# EAGLE board Prairie_Dogs_V1 (EAGLE 9.6.2)

Size 172.72 x 106.41 mm. Coordinates in mm from the lower left corner, seen from the top.
Outline: 168.83,106.41 5.28,106.17 arc90 0,100.89 0,4.33 arc90 4.33,0 166.75,0.24 arc90 172.72,6.22 172.72,102.53 arc90 168.83,106.41
Copper layers (1*16): Top 0.035559375mm / dielectric 1.6mm / Bottom 0.035559375mm
Design rules "oshpark-2layer (1) *": minimum track width 10mil, minimum drill 10mil, track to track 8mil, track to pad 8mil, pad to pad 8mil, via to via 8mil, smd to smd 8mil, copper to edge 15mil, drill to drill 6mil, minimum pad ring 5mil, minimum via ring 5mil, stop-mask expansion 2.5mil, vias tented up to drill 25mil, thermal gap 10mil

## Footprints (pad centres in the part's own frame; a part is rotated, then mirrored left to right if it is on the bottom)
M0805 = smd 1.3 x 1.6: 1 -0.95,0; 2 0.95,0
MSTBA3 = drill 1.397 long: 1 -5.08,5.08; 2 0,5.08; 3 5.08,5.08
MSTBA2 = drill 1.397 long: 1 -2.54,5.08; 2 2.54,5.08
MSTBA5 = drill 1.397 long: 1 -10.16,5.08; 2 -5.08,5.08; 3 0,5.08; 4 5.08,5.08; 5 10.16,5.08
MSTBA4 = drill 1.397 long: 1 -7.62,5.08; 2 -2.54,5.08; 3 2.54,5.08; 4 7.62,5.08
SO-8_POWER_PAK = smd 0.762 x 2.032: D1 -3.423,2.437; D2 -2.153,2.437; D3 -0.883,2.437; D4 0.387,2.437; G 0.387,-3.532 | smd 3.81 x 3.048: D5 -1.518,0.278 | smd 3.302 x 2.032: S -2.153,-3.532
STANDOFF_ELECTRICAL_5_32 = drill 3.969 pad 7.62: P1 0,0
P2-38-17 = drill 1.702 pad 2.121 long: TP-1 -1.905,0; TP-2 1.905,0
ADAFRUIT_LENOARDO = drill 1.016 pad 1.88: 3V -10.16,-21.59; 5V -10.16,8.89; A0 -10.16,1.27; A1 -10.16,-1.27; A2 -10.16,-3.81; A3 -10.16,-6.35; A4 -10.16,-8.89; A5 -10.16,-11.43; AREF -10.16,6.35; D4 2.54,-21.59; D5 5.08,-11.43; D6 0,-21.59; D7 5.08,-8.89; D8 -2.54,-21.59; D9 5.08,-6.35; D10 5.08,-3.81; D11 5.08,-1.27; D12 5.08,1.27; D13 5.08,3.81; EN -7.62,-21.59; GND@0 -10.16,3.81; GND@1 -5.08,-21.59; GND@2 5.08,8.89; MISO -10.16,-19.05; MOSI -10.16,-16.51; RES -10.16,11.43; RX 5.08,-21.59; SCK -10.16,-13.97; SCL 5.08,-13.97; SDA 5.08,-16.51; TX 5.08,-19.05; USB 5.08,6.35; VIN 5.08,11.43

## Placement (x,y rotation side)
10K  [M0805]  44.45,49.52 270 top
10K1  [M0805]  36.83,49.52 270 top
12V_IN  MSTBA3  [MSTBA3]  142.24,6.34 0 top
CALIBRATION_BTN  MSTBA2  [MSTBA2]  138.43,100.32 180 top
FAN_CONTROL  MSTBA2  [MSTBA2]  69.85,100.32 180 top
HAPP_STARTBUTTON  MSTBA5  [MSTBA5]  107.44,100.32 180 top
OXY_SENSOR_IN  MSTBA4  [MSTBA4]  34.29,6.34 0 top
Q1  MOSFET-NCH  [SO-8_POWER_PAK]  48.26,62.22 0 top
Q2  MOSFET-NCH  [SO-8_POWER_PAK]  35.56,62.22 0 top
S1  STANDOFF_ELECTRICAL5-32  [STANDOFF_ELECTRICAL_5_32]  15.49,93.21 0 top
S2  STANDOFF_ELECTRICAL5-32  [STANDOFF_ELECTRICAL_5_32]  86.36,93.21 0 top
S3  STANDOFF_ELECTRICAL5-32  [STANDOFF_ELECTRICAL_5_32]  157.23,12.95 0 top
S4  STANDOFF_ELECTRICAL5-32  [STANDOFF_ELECTRICAL_5_32]  157.23,93.21 0 top
S6  STANDOFF_ELECTRICAL5-32  [STANDOFF_ELECTRICAL_5_32]  86.36,12.95 0 top
S8  STANDOFF_ELECTRICAL5-32  [STANDOFF_ELECTRICAL_5_32]  15.49,12.95 0 top
SERIAL_OUTPUT  MSTBA4  [MSTBA4]  64.77,6.34 0 top
SPARE_PWM_MOSFET  MSTBA2  [MSTBA2]  40.64,100.32 180 top
TP1  PTR2  [P2-38-17]  123.19,12.69 270 top
TP2  PTR2  [P2-38-17]  123.19,5.07 270 top
U1  ITSYBITSY_5V  [ADAFRUIT_LENOARDO]  101.6,26.66 180 top

## Library data of the parts
10K 10K1 = adafruit
12V_IN = con-phoenix-508; MF: FARNELL; MPN: 1757255; OC_FARNELL: 3705183; OC_NEWARK: 71C4162
CALIBRATION_BTN FAN_CONTROL SPARE_PWM_MOSFET = th_libraries; MF: FARNELL; MPN: 1757242; OC_FARNELL: 3705171; OC_NEWARK: 71C4161
HAPP_STARTBUTTON = con-phoenix-508; MPN: 1757271; OC_FARNELL: 3705201; OC_NEWARK: 71C4164
OXY_SENSOR_IN SERIAL_OUTPUT = th_libraries; MF: FARNELL; MPN: 1757268; OC_FARNELL: 3705195; OC_NEWARK: 71C4163
Q1 Q2 U1 = th_ds_libraries
S1-S4 S6 S8 = th_libraries
TP1 TP2 = testpad

## Nets
5V: SERIAL_OUTPUT.3 TP2.TP-1 U1.5V
12V: 12V_IN.1 HAPP_STARTBUTTON.3 OXY_SENSOR_IN.2 SPARE_PWM_MOSFET.1 TP2.TP-2
GND: 12V_IN.3 CALIBRATION_BTN.1 FAN_CONTROL.1 HAPP_STARTBUTTON.5 OXY_SENSOR_IN.4 Q1.S Q2.S S1.P1 S2.P1 S3.P1 S4.P1 S6.P1 S8.P1 TP1.TP-1 TP1.TP-2 U1.GND@2
N$1: HAPP_STARTBUTTON.2 Q1.D1
N$2: HAPP_STARTBUTTON.4 U1.SCL
N$3: OXY_SENSOR_IN.1 U1.A0
N$4: Q2.D1 SPARE_PWM_MOSFET.2
N$5: 10K1.2 U1.D9
N$6: 10K.1 Q1.G
N$7: 10K1.1 Q2.G
N$8: SERIAL_OUTPUT.2 U1.TX
N$9: 10K.2 U1.D11
N$10: SERIAL_OUTPUT.4 U1.GND@1
N$11: SERIAL_OUTPUT.1 U1.RX
N$12: FAN_CONTROL.2 U1.D12
N$14: CALIBRATION_BTN.2 U1.D5

## Tracks (layer width: path | path; a pad name or v marks a point on that pad's centre or on a via)
5V  (2 unrouted)
12V  (4 unrouted)
GND  (15 unrouted)
N$1  (1 unrouted)
N$2  (1 unrouted)
N$3  (1 unrouted)
N$4  (1 unrouted)
N$5  (1 unrouted)
N$6  (1 unrouted)
N$7  (1 unrouted)
N$8  (1 unrouted)
N$9  (1 unrouted)
N$10  (1 unrouted)
N$11  (1 unrouted)
N$12  (1 unrouted)
N$14  (1 unrouted)

## Text on the board
tPlace: Adafruit Itsybitsy / 32u4
tNames: GND | Button In -> | 12v | Btn Light | Button In -> | GND | 12v | Fan_Pin | GND | GND | BTN PWM | GND | RX | TX | 10k OHM | Button In -> | DOT: Prairie Dogs / V1.2 / 9/30/2022 / Aaron De Lanty | OMSI | BTN PWM | Fan_Pin | <- Sensor Data | GND | 12v | GND | 5V | Sensor Data -> | GND | RX | TX | 5V | GND | 12v | GND | GND | 5v | 12v